# Allegro board led_project 1.brd
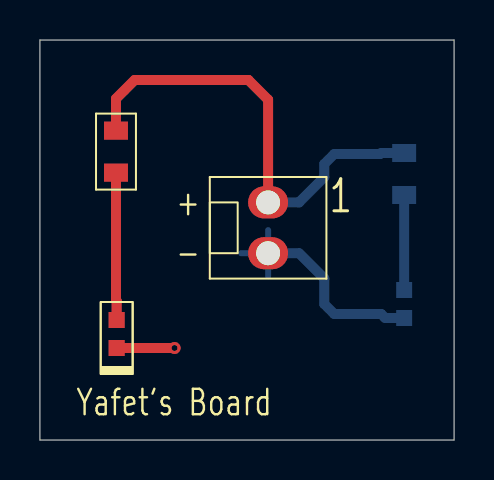
[diagram p0: board, top side]
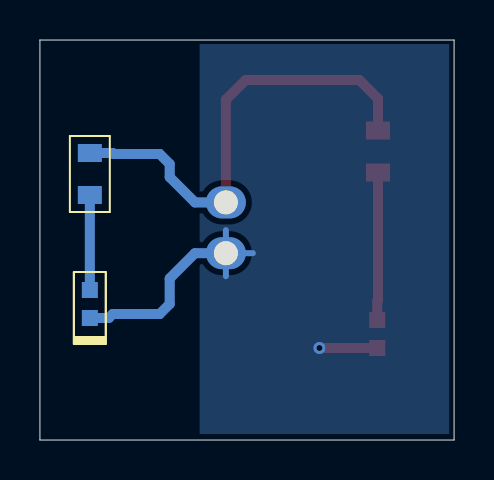
[diagram p1: board, bottom side, seen from below]

Outline 20.75 x 20 mm; copper layers: TOP, BOTTOM. Coordinates in mm from the lower left corner of the outline.
Outline path: 0,20 0,0 20.75,0 20.75,20 0,20

## Design rules (mm)
constraint set DEFAULT: min track width 0.3

## Placement (name value [footprint] x y rotation side)
D1  Green  [LED0603G]  3.84 5.3 90 top
D2  Green  [LED0603G]  18.25 6.8 90 bottom
J1  1x2 Header  [HDR1X2]  11.43 11.88 0 top
R1  360R 1%  [R0805]  3.81 14.42 270 top
R2  360R 1%  [R0805]  18.25 13.3 270 bottom

## Library data of the parts
D1 D2 = LED GREEN CLEAR CHIP 0603 SMD
J1 = CONN HEADER VERT 2POS 2.54MM
R1 R2 = RES SMD 360 OHM 1% 1/8W 0805

## Footprints (pads in the part's own frame, mm; a bottom-side part is the same pattern mirrored in y, then rotated)
HDR1X2
  oval 2x1.6 hole 1.2: 1(0,0) 2(0,-2.54)
LED0603G
  rect 0.8x0.8 smd: 1(-0.7,0) 2(0.7,0)
R0805
  rect 0.9x1.2 smd: 1(-1.05,0) 2(1.05,0)

## Nets
+3V3: J1.1 R1.1 R2.1
GND: D1.1(C) D2.1(C) J1.2(-)
DIODE1: D1.2 R1.2
DIODE2: D2.2 R2.2

## Via types
v1: diameter 0.6, hole 0.3, TOP to BOTTOM, 1 via

## Routing (per net, layer and track width the routed paths; a pad name or vN(x,y) marks a point on that pad's centre or on a via; arc(x,y) is an arc through that point)
+3V3: length 23.4
  TOP w0.5: J1.1 11.43,17.02 10.45,18 4.75,18 3.81,17.06 R1.1
  BOTTOM w0.5: J1.1 12.98,11.88 14.25,13.14 14.25,13.8 14.75,14.3 17.05,14.3 17.09,14.35 R2.1
GND: length 15.5
  TOP w0.5: D1.1 v1(6.75,4.6)
  BOTTOM w0.3: 10.08,9.34 J1.2 ; J1.2 11.43,8.19 ; J1.2 11.43,10.49
  BOTTOM w0.5: J1.2 12.98,9.34 14.25,8.08 14.25,6.8 14.75,6.3 17.09,6.3 17.29,6.1 D2.1
DIODE1: length 7.4
  TOP w0.5: D1.2 3.84,6.95 3.81,6.99 R1.2
DIODE2: length 4.8
  BOTTOM w0.5: D2.2 R2.2

## Copper pours and planes (outline as drawn; the poured copper is in the pictures)
GND on BOTTOM: 0.25,0.3 0.25,19.8 12.75,19.8 12.75,0.3

## Text on the board
Ref Des/Silkscreen Top: Yafet's Board | + | -
